# Altium PCB NEpic.PcbDoc (part 1 of 5)
Units mil, origin at the board's own origin, x right, y up, seen from the top; angles counter-clockwise.
Board outline 1660 x 1990 mil, 4 copper layers (Top Layer, GND, VCC, Bottom Layer); 30 components, 61 nets, 194 pads, 84 vias.
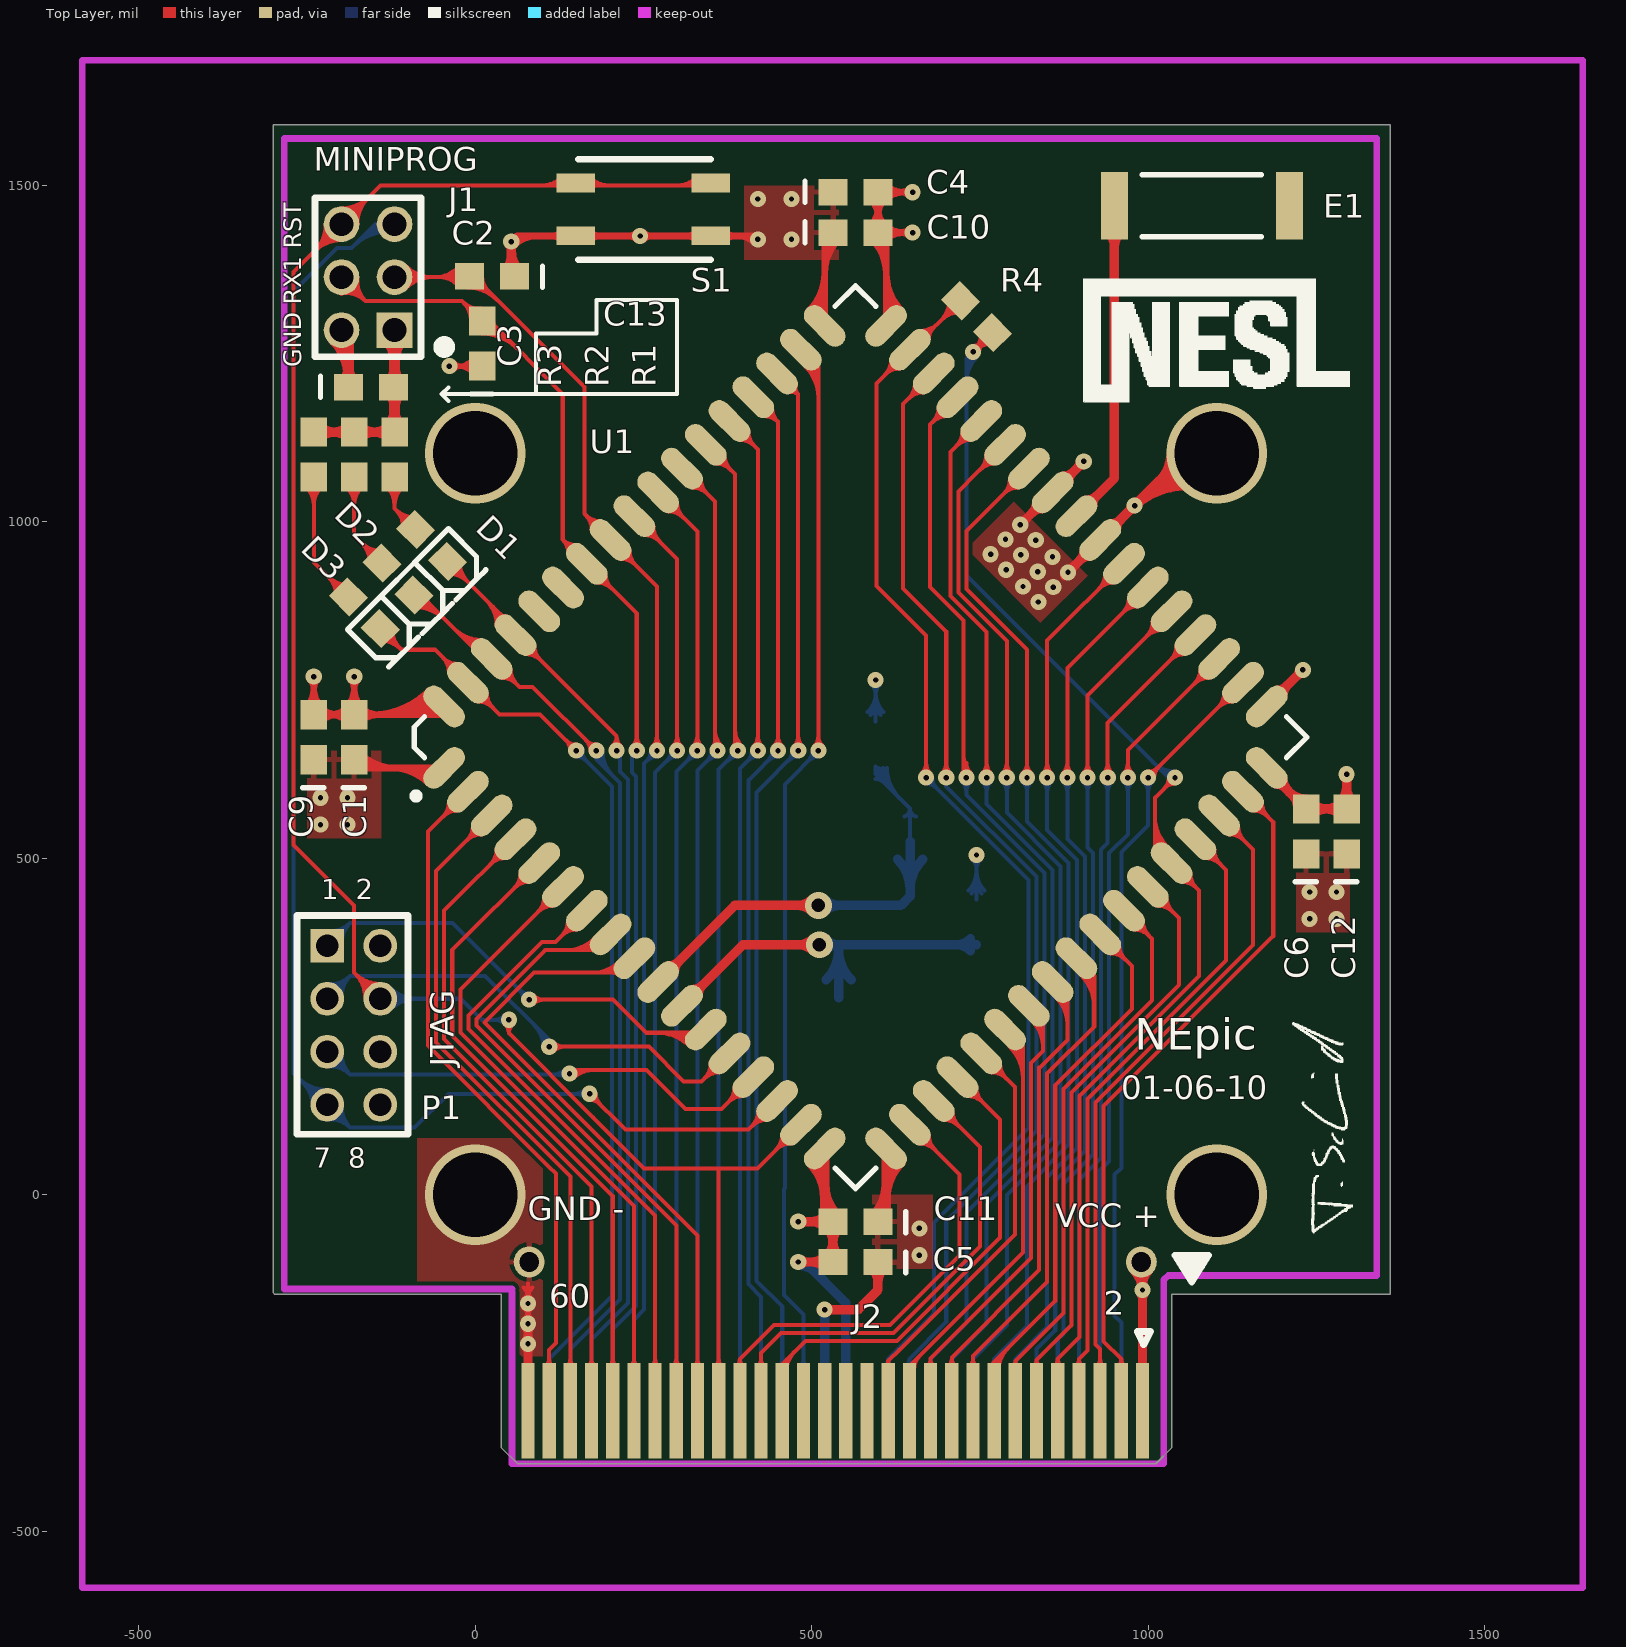
[diagram p0: Top Layer view]
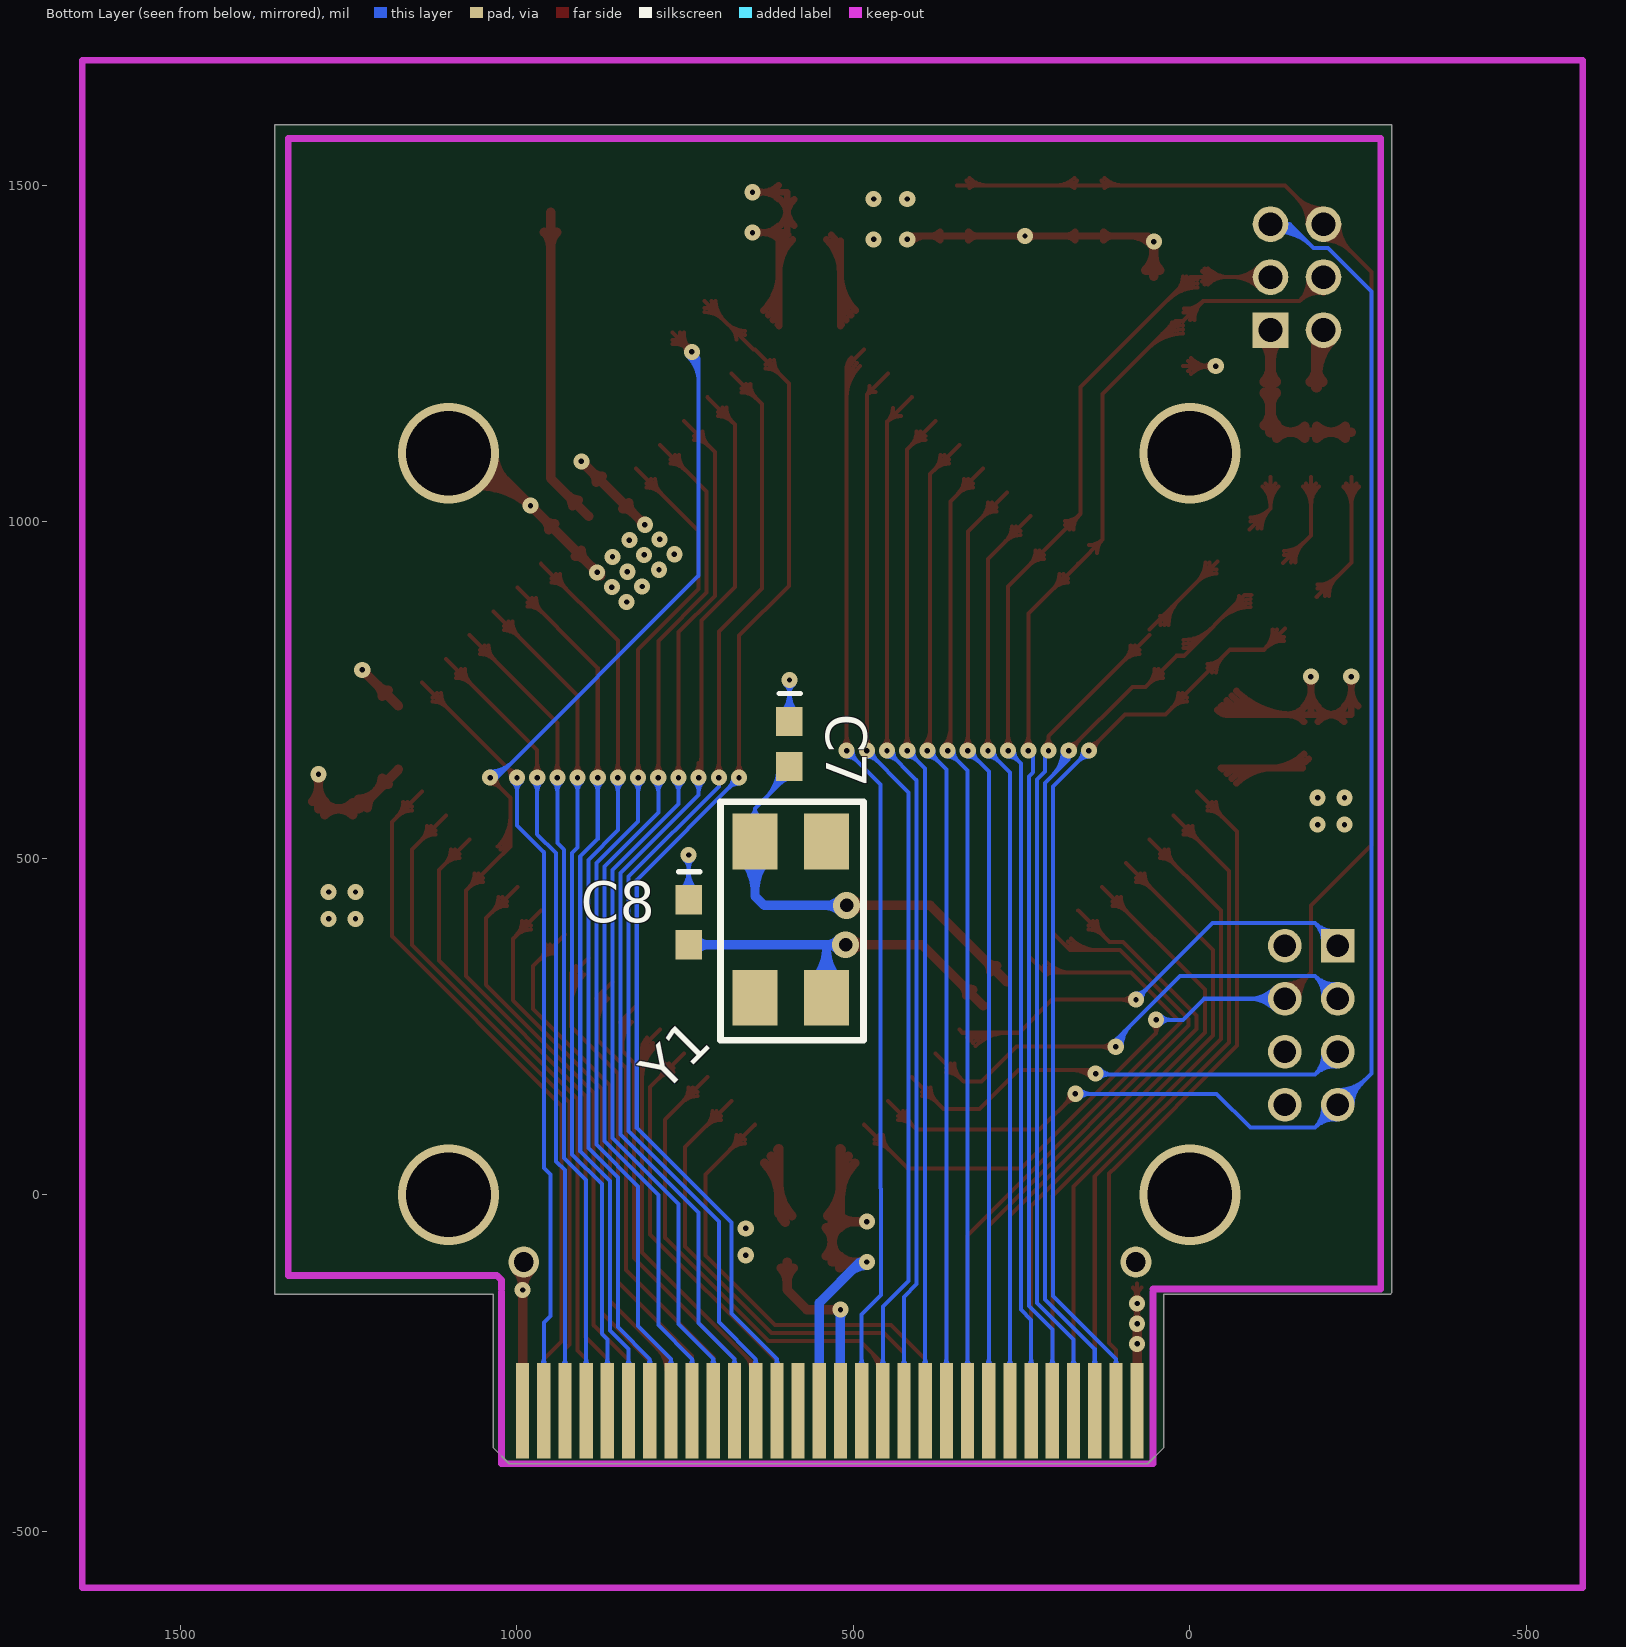
[diagram p1: Bottom Layer view, seen from below]
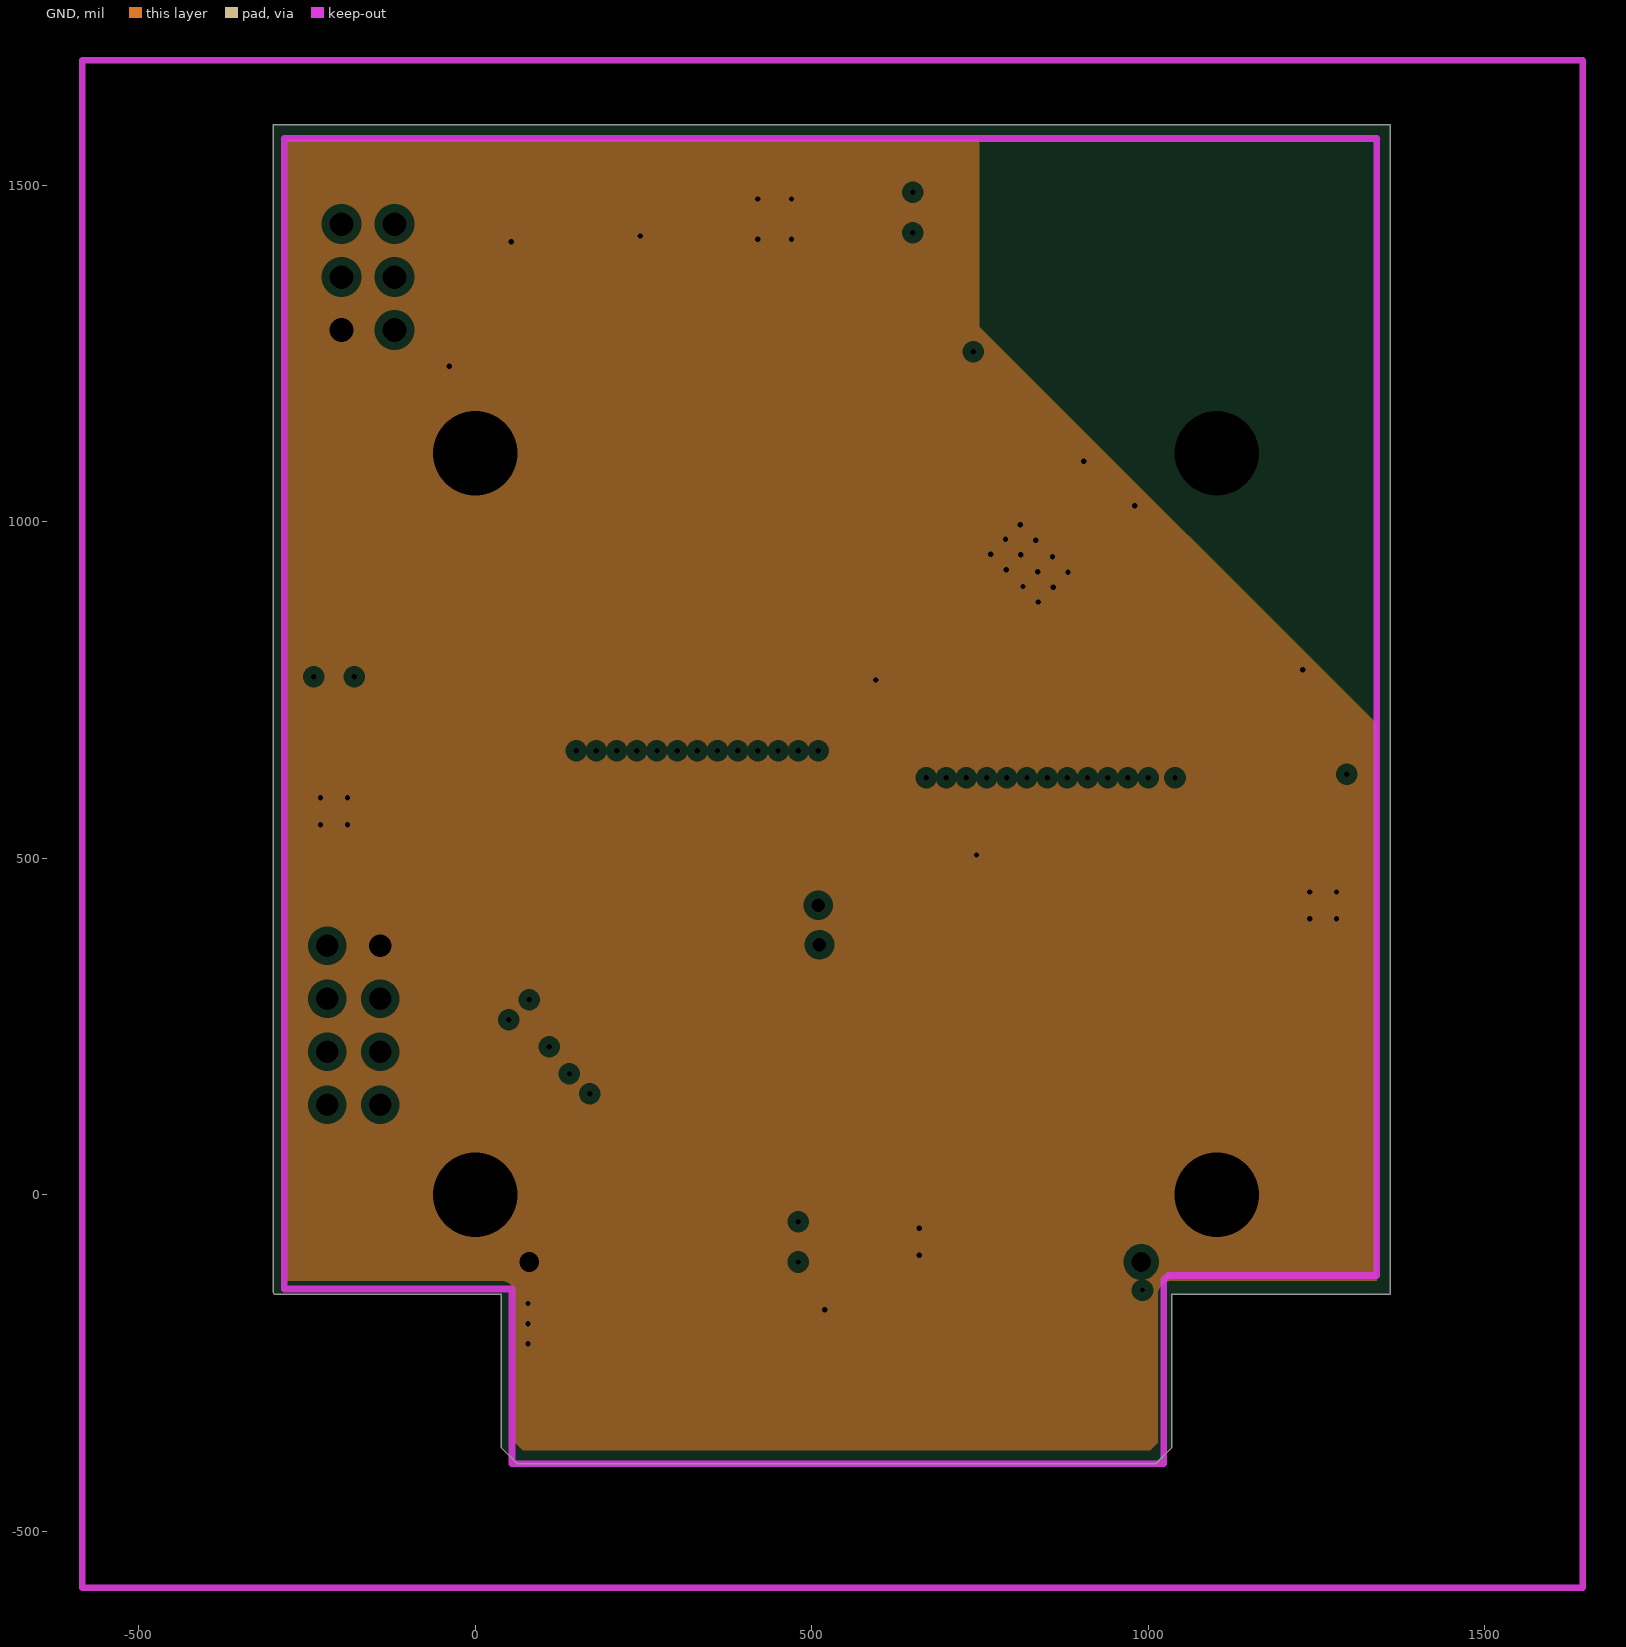
[diagram p2: GND, clearances drawn from the general rule]
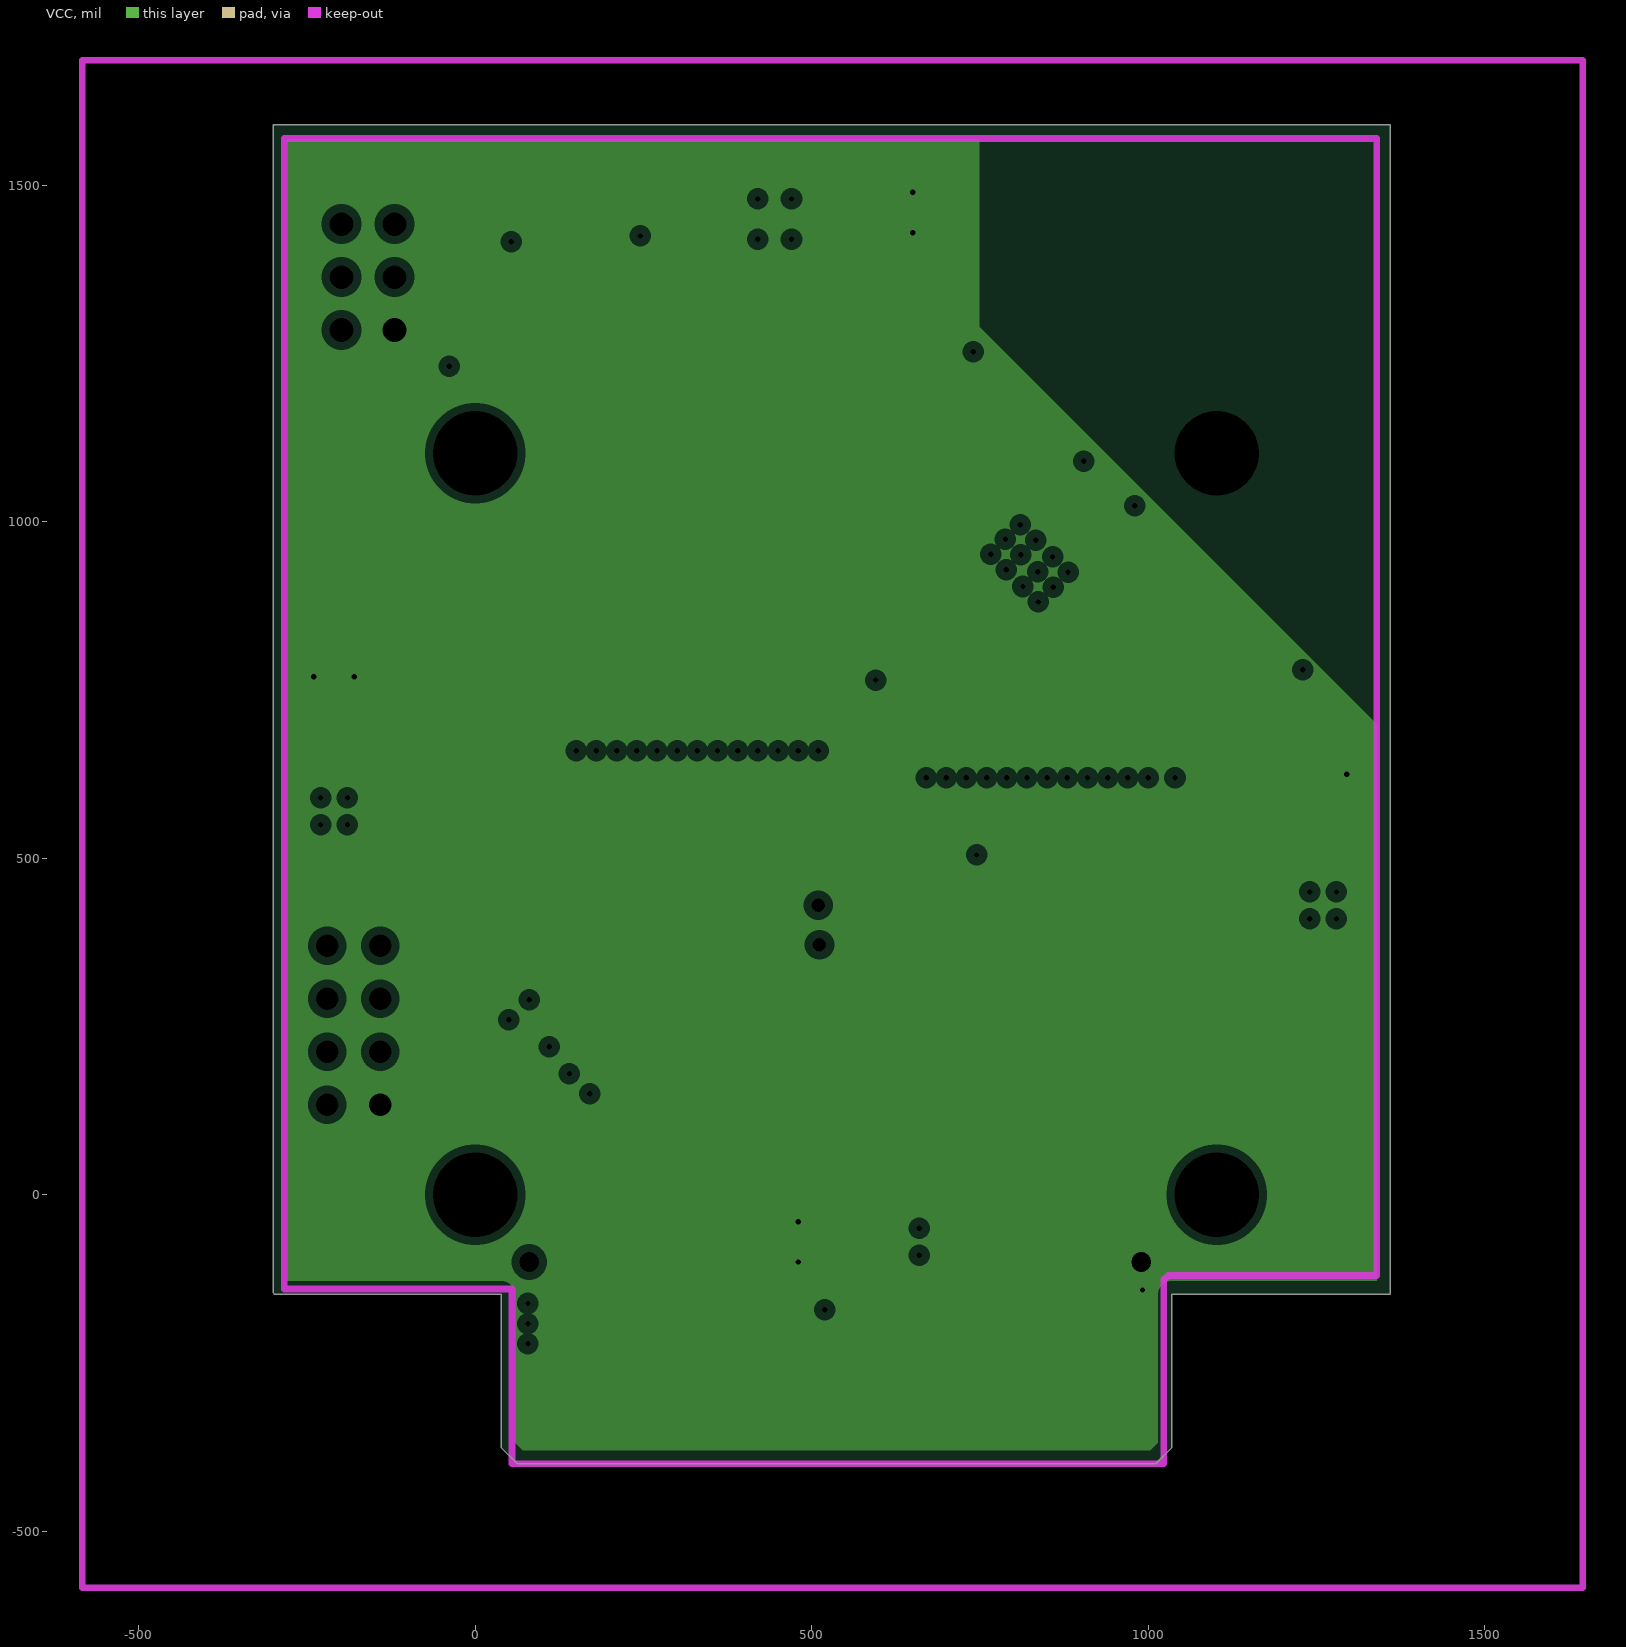
[diagram p3: VCC, clearances drawn from the general rule]

## Layer stack, top to bottom
Top Layer: signal copper 1.4
Dielectric: core 12.6, FR-4, Dk 4.8
GND: plane copper 1.4, net GND
Dielectric: prepreg 12.6, FR-4, Dk 4.8
VCC: plane copper 1.4, net VCC
Dielectric: core 12.6, FR-4, Dk 4.8
Bottom Layer: signal copper 1.4

## Board outline
-298.03,-148.03 -300,-146.06 -300,1590 1360,1590 1360,-148.03 1035,-148.03 1035,-376.38 1011.38,-400 62.56,-400 38.94,-376.38 38.94,-148.03

## Design rules (kind name [scope] priority, off if disabled: settings)
Clearance "Clearance~Sunstone Circuits" [All] p1: gap=6 // Sunstone Circuits Minimum Clearance Rule (MLB~4&6 Layer Designs)
HoleSize "HoleSize~Sunstone Circuits" [All] p1: absolutevalues=TRUE maxlimit=251 minlimit=8 maxpercent=80.000 minpercent=20.000 // Sunstone Circuits Hole Size Rule (MLB~4&6 Layer Designs)
HoleSize Testpoint [All] p2: absolutevalues=TRUE maxlimit=100 minlimit=1 maxpercent=80.000 minpercent=20.000
HoleSize TestPointUsage [All] p3: absolutevalues=TRUE maxlimit=100 minlimit=1 maxpercent=80.000 minpercent=20.000
MinimumAnnularRing "MinimumAnnularRing~Sunstone Circuits" [All] p1: minimumring=7 // Sunstone Circuits Minimum Annular Ring (MLB~4&6 Layer Designs)
PlaneClearance "PlaneClearance~Sunstone Circuits" [All] p1: clearance=12 // Sunstone Circuits Power Plane Clearance Rule (MLB~4&6 Layer Designs)
PlaneConnect [isVia] p1: planeconnectstyle=Direct reliefexpansion=20 reliefentries=4 reliefconductorwidth=10 reliefairgap=10
PlaneConnect "PlaneConnect~Sunstone Circuits" [All] p2: planeconnectstyle=Relief reliefexpansion=10 reliefentries=4 reliefconductorwidth=8 reliefairgap=10 // Sunstone Circuits Power Plane Connect Rule (MLB~4&6 Layer Designs)
PolygonConnect [isVia] p1: connectstyle=Direct reliefconductorwidth=10 reliefentries=4 polygonreliefangle="90 Angle"
PolygonConnect "PolygonConnect~Sunstone Circuits" [All] p2: connectstyle=Relief reliefconductorwidth=8 reliefentries=4 polygonreliefangle="90 Angle" // Sunstone Circuits Polygon Connect Style (MLB~4&6 Layer Designs)
RoutingVias "RoutingVias~Sunstone Circuits" [All] p1: holewidth=8 width=24 viastyle="Through Hole" minholewidth=8 minwidth=24 maxholewidth=20 maxwidth=40 // Sunstone Circuits Routing Vias Rule (MLB~4&6 Layer Designs)
ShortCircuit "ShortCircuit~Sunstone Circuits" [All] p1: allowed=FALSE // Sunstone Circuits Short Circuit Rule~Do Not Allow (MLB~4&6 Layer Designs)
SilkscreenOverComponentPads [All] p1: minsilkscreentomaskgap=10
SolderMaskExpansion "SolderMaskExpansion~Sunstone Circuits" [All] p1: expansion=3 // Sunstone Circuits Solder Mask Expansion Rule (MLB~4&6 Layer Designs)
ViasUnderSMD "ViasUnderSMD~Sunstone Circuits" [All] p1: allowed=FALSE // Sunstone Circuits Vias Under SMD~Do Not Allow (MLB~4&6 Layer Designs)
Width "Width~Sunstone Circuits" [All] p1: maxlimit=100 minlimit=6 preferedwidth=10 // Sunstone Circuits Minimum Width Rule (MLB~4&6 Layer Designs)
23 further rules are at their usual default settings.

## Components (designator, comment, footprint, x,y, rotation, side; value= is the part's Value field where it differs from the comment)
C1 "Cap" CC1608-0603 -180,680 r90 top
C2 "Cap" CC1608-0603 25,1365 r180 top
C3 "Cap" CC1608-0603 10,1265 r90 top
C4 "Cap" CC1608-0603 565,1490 r0 top
C5 "Cap" CC1608-0603 565,-100 r180 top
C6 "Cap" CC1608-0603 1235,540 r90 top
C7 "Cap" CC1608-0603 595,670 r270 bottom
C8 "Cap" CC1608-0603 745,405 r270 bottom
C9 "Cap" CC1608-0603 -240,680 r90 top
C10 "Cap" CC1608-0603 565,1430 r0 top
C11 "Cap" CC1608-0603 565,-40 r180 top
C12 "Cap" CC1608-0603 1295,540 r90 top
C13 "Cap" CC1608-0603 -155,1200 r0 top
D1 "LITEON/LED RED" LITEON/LED/0603 -65,965 r315 top
D2 "LITEON/LED GREEN" LITEON/LED/0603 -115,915 r315 top
D3 "LITEON/LED BLUE" LITEON/LED/0603 -165,865 r315 top
E1 "ANT/ATN-2.4" ANT/ANT-2.45-CHPCT-ND 1080,1470 r0 top
J1 "Epic MiniProg" "6-pin 2mm" -120,1285 r90 top
J2 "SAMTEC/MEC8-130" SAMTEC/MEC8L-130-CARD 1035,-400 r180 top locked
P1 "Epic JTAG" "Thomas/Header 2x4 2mm" -220,370 r270 top
R1 "Res3" CR1608-0603 -120,1100 r270 top
R2 "Res3" CR1608-0603 -180,1100 r270 top
R3 "Res3" CR1608-0603 -240,1100 r270 top
R4 "Res3" CR1608-0603 745,1305 r315 top
S1 "PANASONIC/EVQP2" PANASONIC/EVQP2 350,1425 r180 top
U1 "Epic Mote Compact" EPIC-Footprint 565,680 r45 top locked
Y1 "CRYSTAL_0" FOX/FQ7050B 540,525 r270 bottom
? "Comment" Signature_Thomas_Small 1305,-20 r90 top
? "Comment" Signature_Thomas_Small 1695,-1290 r90 top
? "Comment" NESL_Logo 900,1180 r0 top

## Footprints (in the part's own frame and the unit in brackets; to place one, negate y for a bottom-side part, rotate by r counter-clockwise, add the part's x,y. Pads: shape width x height; smd on the part's side, far side on the other; paste and mask are expansions set on the pad)
"6-pin 2mm" [mm] "6-pin 2mm spacing header"
  rect 1.346x1.346 hole 0.9 mask+0: 1(0,0)
  round 1.346 hole 0.9 mask+0: 2(0,2) 3(2,0) 4(2,2) 5(4,0) 6(4,2)
  silkscreen extent -1,-2.04 5,3
ANT/ANT-2.45-CHPCT-ND [mil] "ANT 2.4 GHZ SMD Chip Antenna"
  rect 40x100 smd mask+0: 1(-130,0) ""(130,0)
  silkscreen extent -89,-46 89,46, body extent -128,-43 128,43, height 39
CC1608-0603 [mm] "Chip Capacitor; Body 1.6 x 0.8 mm (LxW typ)"
  rect 1.1x1 smd mask+0: 1(-0.85,0) 2(0.85,0)
  silkscreen extent -1.91,-0.38 -1.91,0.42
CR1608-0603 [mm] "Chip Resistor; Body 1.6 x 0.8 mm (LxW typ)"
  rect 1.1x1 smd mask+0: 1(-0.85,0) 2(0.85,0)
EPIC-Footprint [mm] "LCC, 68-Pins, Body 24.1x24.1mm (max), Pitch 1.27mm, IPC Medium Density"
  oval 1.9x0.8 smd mask+0: 1(-11.8,10.16) 2(-11.8,8.89) 3(-11.8,7.62) 4(-11.8,6.35) 5(-11.8,5.08) 6(-11.8,3.81) 7(-11.8,2.54) 8(-11.8,1.27) 9(-11.8,0) 10(-11.8,-1.27) 11(-11.8,-2.54) 12(-11.8,-3.81) 13(-11.8,-5.08) 14(-11.8,-6.35) 15(-11.8,-7.62) 16(-11.8,-8.89) 17(-11.8,-10.16) 35(11.8,-10.16) 36(11.8,-8.89) 37(11.8,-7.62) 38(11.8,-6.35) 39(11.8,-5.08) 40(11.8,-3.81) 41(11.8,-2.54) 42(11.8,-1.27) 43(11.8,0) 44(11.8,1.27) 45(11.8,2.54) 46(11.8,3.81) 47(11.8,5.08) 48(11.8,6.35) 49(11.8,7.62) 50(11.8,8.89) 51(11.8,10.16)
  oval 0.8x1.9 smd mask+0: 18(-10.16,-11.8) 19(-8.89,-11.8) 20(-7.62,-11.8) 21(-6.35,-11.8) 22(-5.08,-11.8) 23(-3.81,-11.8) 24(-2.54,-11.8) 25(-1.27,-11.8) 26(0,-11.8) 27(1.27,-11.8) 28(2.54,-11.8) 29(3.81,-11.8) 30(5.08,-11.8) 31(6.35,-11.8) 32(7.62,-11.8) 33(8.89,-11.8) 34(10.16,-11.8) 52(10.16,11.8) 53(8.89,11.8) 54(7.62,11.8) 55(6.35,11.8) 56(5.08,11.8) 57(3.81,11.8) 58(2.54,11.8) 59(1.27,11.8) 60(0,11.8) 61(-1.27,11.8) 62(-2.54,11.8) 63(-3.81,11.8) 64(-5.08,11.8) 65(-6.35,11.8) 66(-7.62,11.8) 67(-8.89,11.8) 68(-10.16,11.8)
  silkscreen extent -13.42,-12.05 12.05,12.05, body extent -12.07,-12.07 12.07,12.07, height 2.54
FOX/FQ7050B [mm] "FOX FQ7050B Crystal Oscillaotr Footprint"
  rect 2.1x1.7 smd: 1(0,-2.7) 2(5.9,0) ""(0,0) ""(5.9,-2.7)
  silkscreen extent -1.5,-4 7.5,1.4
LITEON/LED/0603 [mm] "Chip LED; 0603; Body 1.6 x 0.8 mm (LxW typ)"
  rect 1.1x1 smd mask+0: 1(-0.85,0) 2(0.85,0)
  silkscreen extent 0,-0.9 2.1,0.9
NESL_Logo [mil]
  silkscreen extent 5,-1 400,181
PANASONIC/EVQP2 [mm] "Panasonic EVQP2 SMD Light Touch Switch 4.7mmx3.5mm"
  rect 1.45x0.7 smd mask+0: 1(5.1,0) 2(5.1,-2) 3(0,0) 4(0,-2)
  silkscreen extent 0,-2.9 5,0.9
SAMTEC/MEC8L-130-CARD [mm] "CARD Edge Connector for MEC8L-130, 30 positions, 60 pins"
  rect 0.5x3.6 smd far side: 1(1.1,-2) 3(1.9,-2) 5(2.7,-2) 7(3.5,-2) 9(4.3,-2) 11(5.1,-2) 13(5.9,-2) 15(6.7,-2) 17(7.5,-2) 19(8.3,-2) 21(9.1,-2) 23(9.9,-2) 25(10.7,-2) 27(11.5,-2) 29(12.3,-2) 31(13.1,-2) 33(13.9,-2) 35(14.7,-2) 37(15.5,-2) 39(16.3,-2) 41(17.1,-2) 43(17.9,-2) 45(18.7,-2) 47(19.5,-2) 49(20.3,-2) 51(21.1,-2) 53(21.9,-2) 55(22.7,-2) 57(23.5,-2) 59(24.3,-2)
  rect 0.5x3.6 smd: 2(1.1,-2) 4(1.9,-2) 6(2.7,-2) 8(3.5,-2) 10(4.3,-2) 12(5.1,-2) 14(5.9,-2) 16(6.7,-2) 18(7.5,-2) 20(8.3,-2) 22(9.1,-2) 24(9.9,-2) 26(10.7,-2) 28(11.5,-2) 30(12.3,-2) 32(13.1,-2) 34(13.9,-2) 36(14.7,-2) 38(15.5,-2) 40(16.3,-2) 42(17.1,-2) 44(17.9,-2) 46(18.7,-2) 48(19.5,-2) 50(20.3,-2) 52(21.1,-2) 54(21.9,-2) 56(22.7,-2) 58(23.5,-2) 60(24.3,-2)
  Keep-Out Layer lines w0.254: 24.9,-6.5 24.9,0 0.3,0 0.3,-6.5
  silkscreen extent 0.8,-5 1.3,-4.5
Signature_Thomas_Small [mil] "smaller signature"
  silkscreen extent -37,1 276,90
"Thomas/Header 2x4 2mm" [mm] "2x4 Header spaced 2mm"
  rect 1.27x1.27 hole 0.838 mask+0: 1(0,0)
  round 1.27 hole 0.838 mask+0: 2(0,2) 3(2,0) 4(2,2) 5(4,0) 6(4,2) 7(6,0) 8(6,2)
  silkscreen extent -1.14,-1.14 7.11,3.05

## Part data
C1 C2 C3 C4 C5 C6 C7 C8 C9 C10 C11 C12 C13: "Capacitor (Semiconductor SIM Model)"
D1: "LiteOn Red LED 0605 Footprint"
D2: "LiteOn Green LED 0605 Footprint"
D3: "LiteOn Blue LED 0605 Footprint"
E1: library part Antenna, "ANT/ANT-2.4 Chip Antenna"
J2: library part SAMTEC/HSEC8/50, "0.8mm Pitch 60 pin Card Edge Socket"
P1: library part "Header 4X2", "Header, 4-Pin, Dual row"
R1 R2 R3 R4: "Resistor"

## Free pads (board coordinates)
  round 46 hole 29: 0(80,-100) 0(990,-100)

## Via types
v1: diameter 24, hole 8, Top Layer to Bottom Layer, tented both sides, 78 vias
v2: diameter 150, hole 126, Top Layer to Bottom Layer, 4 vias
v3: diameter 40, hole 20, Top Layer to Bottom Layer, tented both sides, 2 vias

## Nets (pads, with @x,y where several pads share a name; then routed paths per layer and width w, separated by ;. In a path a pad name is that pad's centre, name@x,y a point inside that pad or via, vN(x,y) a via of type N, cw(c..) or ccw(c..) an arc to the next point about the centre after c; other vN are vias at no path point)
ADC0: J2.40 U1.19 | length 1089.3
  Top Layer w6: J2.40@393.27,-321.26 393.27,-244 ; U1.19@646.01,104.01 720,30.03 720,-90 616.61,-193.39 443.87,-193.39 393.27,-244 ; J2.40@388.49,-255.34 ccw(c377.43,-244) 393.27,-244 ; J2.40@388.49,-255.34 ccw(c377.43,-244) 393.27,-244 ; J2.40@388.49,-255.34 ccw(c377.43,-244) 393.27,-244 ; J2.40@388.49,-255.34 ccw(c377.43,-244) 393.27,-244 ; 393.27,-244 ccw(c409.11,-244) J2.40@398.05,-255.34 ; 393.27,-244 ccw(c409.11,-244) J2.40@398.05,-255.34 ; 393.27,-244 ccw(c409.11,-244) J2.40@398.05,-255.34 ; 393.27,-244 ccw(c409.11,-244) J2.40@398.05,-255.34 ; U1.19@661.32,75.95 cw(c661.32,45.18) 683.09,66.94 ; U1.19@661.32,75.95 cw(c661.32,45.18) 683.09,66.94 ; U1.19@661.32,75.95 cw(c661.32,45.18) 683.09,66.94 ; U1.19@661.32,75.95 cw(c661.32,45.18) 683.09,66.94 ; U1.19@661.32,81.95 cw(c661.32,65.66) 672.84,77.18 ; U1.19@661.32,81.95 cw(c661.32,65.66) 672.84,77.18 ; U1.19@661.32,81.95 cw(c661.32,65.66) 672.84,77.18 ; U1.19@661.32,81.95 cw(c661.32,65.66) 672.84,77.18 ; U1.19@668.07,88.7 ccw(c684.36,88.7) 672.84,77.18 ; U1.19@668.07,88.7 ccw(c684.36,88.7) 672.84,77.18 ; U1.19@668.07,88.7 ccw(c684.36,88.7) 672.84,77.18 ; U1.19@668.07,88.7 ccw(c684.36,88.7) 672.84,77.18 ; U1.19@674.07,88.7 ccw(c704.85,88.7) 683.09,66.94 ; U1.19@674.07,88.7 ccw(c704.85,88.7) 683.09,66.94 ; U1.19@674.07,88.7 ccw(c704.85,88.7) 683.09,66.94 ; U1.19@674.07,88.7 ccw(c704.85,88.7) 683.09,66.94
ADC1: J2.38 U1.20 | length 1121.1
  Top Layer w6: J2.38@424.76,-321.26 424.76,-235.24 454.61,-205.39 621.58,-205.39 750,-76.97 750,-60 750,70.74 U1.20@681.37,139.37 ; J2.38@419.93,-255.4 ccw(c408.24,-243.72) 424.76,-243.72 ; J2.38@419.93,-255.4 ccw(c408.24,-243.72) 424.76,-243.72 ; J2.38@419.93,-255.4 ccw(c408.24,-243.72) 424.76,-243.72 ; J2.38@419.93,-255.4 ccw(c408.24,-243.72) 424.76,-243.72 ; 424.76,-243.72 ccw(c441.28,-243.72) J2.38@429.6,-255.4 ; 424.76,-243.72 ccw(c441.28,-243.72) J2.38@429.6,-255.4 ; 424.76,-243.72 ccw(c441.28,-243.72) J2.38@429.6,-255.4 ; 424.76,-243.72 ccw(c441.28,-243.72) J2.38@429.6,-255.4 ; U1.20@696.68,111.31 cw(c696.68,80.53) 718.44,102.3 ; U1.20@696.68,111.31 cw(c696.68,80.53) 718.44,102.3 ; U1.20@696.68,111.31 cw(c696.68,80.53) 718.44,102.3 ; U1.20@696.68,111.31 cw(c696.68,80.53) 718.44,102.3 ; U1.20@696.68,117.31 cw(c696.68,101.02) 708.2,112.54 ; U1.20@696.68,117.31 cw(c696.68,101.02) 708.2,112.54 ; U1.20@696.68,117.31 cw(c696.68,101.02) 708.2,112.54 ; U1.20@696.68,117.31 cw(c696.68,101.02) 708.2,112.54 ; U1.20@703.43,124.06 ccw(c719.72,124.06) 708.2,112.54 ; U1.20@703.43,124.06 ccw(c719.72,124.06) 708.2,112.54 ; U1.20@703.43,124.06 ccw(c719.72,124.06) 708.2,112.54 ; U1.20@703.43,124.06 ccw(c719.72,124.06) 708.2,112.54 ; U1.20@709.43,124.06 ccw(c740.2,124.06) 718.44,102.3 ; U1.20@709.43,124.06 ccw(c740.2,124.06) 718.44,102.3 ; U1.20@709.43,124.06 ccw(c740.2,124.06) 718.44,102.3 ; U1.20@709.43,124.06 ccw(c740.2,124.06) 718.44,102.3
ADC2: J2.36 U1.21 | length 1219.9
  Top Layer w6: J2.36@456.26,-321.26 456.26,-251.67 490.54,-217.39 626.55,-217.39 780,-63.94 780,111.45 U1.21@716.72,174.72 ; J2.36@457.1,-260.24 cw(c479.82,-260.24) 463.76,-244.17 ; J2.36@457.1,-260.24 cw(c479.82,-260.24) 463.76,-244.17 ; J2.36@457.1,-260.24 cw(c479.82,-260.24) 463.76,-244.17 ; J2.36@457.1,-260.24 cw(c479.82,-260.24) 463.76,-244.17 ; J2.36@463.1,-260.24 cw(c500.3,-260.24) 474,-233.93 ; J2.36@463.1,-260.24 cw(c500.3,-260.24) 474,-233.93 ; J2.36@463.1,-260.24 cw(c500.3,-260.24) 474,-233.93 ; J2.36@463.1,-260.24 cw(c500.3,-260.24) 474,-233.93 ; U1.21@732.03,146.66 cw(c732.03,115.89) 753.8,137.65 ; U1.21@732.03,146.66 cw(c732.03,115.89) 753.8,137.65 ; U1.21@732.03,146.66 cw(c732.03,115.89) 753.8,137.65 ; U1.21@732.03,146.66 cw(c732.03,115.89) 753.8,137.65 ; U1.21@732.03,152.66 cw(c732.03,136.37) 743.55,147.89 ; U1.21@732.03,152.66 cw(c732.03,136.37) 743.55,147.89 ; U1.21@732.03,152.66 cw(c732.03,136.37) 743.55,147.89 ; U1.21@732.03,152.66 cw(c732.03,136.37) 743.55,147.89 ; U1.21@738.78,159.41 ccw(c755.07,159.41) 743.55,147.89 ; U1.21@738.78,159.41 ccw(c755.07,159.41) 743.55,147.89 ; U1.21@738.78,159.41 ccw(c755.07,159.41) 743.55,147.89 ; U1.21@738.78,159.41 ccw(c755.07,159.41) 743.55,147.89 ; U1.21@744.78,159.41 ccw(c775.56,159.41) 753.8,137.65 ; U1.21@744.78,159.41 ccw(c775.56,159.41) 753.8,137.65 ; U1.21@744.78,159.41 ccw(c775.56,159.41) 753.8,137.65 ; U1.21@744.78,159.41 ccw(c775.56,159.41) 753.8,137.65
ADC3: J2.26 U1.22 | length 995.6
  Top Layer w6: J2.26@613.74,-321.26 613.74,-247.17 ; U1.22@752.08,210.08 802,160.16 802,-58.91 630.91,-230 613.74,-247.17 ; J2.26@609.84,-254.61 ccw(c604.69,-247.17) 613.74,-247.17 ; J2.26@609.84,-254.61 ccw(c604.69,-247.17) 613.74,-247.17 ; J2.26@609.84,-254.61 ccw(c604.69,-247.17) 613.74,-247.17 ; J2.26@609.84,-254.61 ccw(c604.69,-247.17) 613.74,-247.17 ; 613.74,-247.17 ccw(c622.79,-247.17) J2.26@617.64,-254.61 ; 613.74,-247.17 ccw(c622.79,-247.17) J2.26@617.64,-254.61 ; 613.74,-247.17 ccw(c622.79,-247.17) J2.26@617.64,-254.61 ; 613.74,-247.17 ccw(c622.79,-247.17) J2.26@617.64,-254.61 ; U1.22@767.39,182.02 cw(c767.39,151.24) 789.15,173.01 ; U1.22@767.39,182.02 cw(c767.39,151.24) 789.15,173.01 ; U1.22@767.39,182.02 cw(c767.39,151.24) 789.15,173.01 ; U1.22@767.39,182.02 cw(c767.39,151.24) 789.15,173.01 ; U1.22@767.39,188.02 cw(c767.39,171.73) 778.91,183.25 ; U1.22@767.39,188.02 cw(c767.39,171.73) 778.91,183.25 ; U1.22@767.39,188.02 cw(c767.39,171.73) 778.91,183.25 ; U1.22@767.39,188.02 cw(c767.39,171.73) 778.91,183.25 ; U1.22@774.14,194.77 ccw(c790.43,194.77) 778.91,183.25 ; U1.22@774.14,194.77 ccw(c790.43,194.77) 778.91,183.25 ; U1.22@774.14,194.77 ccw(c790.43,194.77) 778.91,183.25 ; U1.22@774.14,194.77 ccw(c790.43,194.77) 778.91,183.25 ; U1.22@780.14,194.77 ccw(c810.91,194.77) 789.15,173.01 ; U1.22@780.14,194.77 ccw(c810.91,194.77) 789.15,173.01 ; U1.22@780.14,194.77 ccw(c810.91,194.77) 789.15,173.01 ; U1.22@780.14,194.77 ccw(c810.91,194.77) 789.15,173.01
ADC4: J2.24 U1.23 | length 1424.1
  Top Layer w6: J2.24@645.24,-321.26 645.24,-254.76 814,-86 814,218.87 ; U1.23@787.43,245.44 814,218.87 ; J2.24@646.08,-260.24 cw(c661.32,-260.24) 650.54,-249.46 ; J2.24@646.08,-260.24 cw(c661.32,-260.24) 650.54,-249.46 ; J2.24@646.08,-260.24 cw(c661.32,-260.24) 650.54,-249.46 ; J2.24@646.08,-260.24 cw(c661.32,-260.24) 650.54,-249.46 ; J2.24@652.08,-260.24 cw(c681.81,-260.24) 660.79,-239.21 ; J2.24@652.08,-260.24 cw(c681.81,-260.24) 660.79,-239.21 ; J2.24@652.08,-260.24 cw(c681.81,-260.24) 660.79,-239.21 ; J2.24@652.08,-260.24 cw(c681.81,-260.24) 660.79,-239.21 ; U1.23@793.73,221.11 cw(c744.79,172.17) 814,172.17 ; U1.23@793.73,221.11 cw(c744.79,172.17) 814,172.17 ; U1.23@793.73,221.11 cw(c744.79,172.17) 814,172.17 ; U1.23@793.73,221.11 cw(c744.79,172.17) 814,172.17 ; U1.23@797.97,225.35 cw(c759.28,186.66) 814,186.66 ; U1.23@797.97,225.35 cw(c759.28,186.66) 814,186.66 ; U1.23@797.97,225.35 cw(c759.28,186.66) 814,186.66 ; U1.23@797.97,225.35 cw(c759.28,186.66) 814,186.66 ; U1.23@802.21,229.6 cw(c773.76,201.14) 814,201.14 ; U1.23@802.21,229.6 cw(c773.76,201.14) 814,201.14 ; U1.23@802.21,229.6 cw(c773.76,201.14) 814,201.14 ; U1.23@802.21,229.6 cw(c773.76,201.14) 814,201.14 ; U1.23@806.46,233.84 cw(c788.25,215.63) 814,215.63 ; U1.23@806.46,233.84 cw(c788.25,215.63) 814,215.63 ; U1.23@806.46,233.84 cw(c788.25,215.63) 814,215.63 ; U1.23@806.46,233.84 cw(c788.25,215.63) 814,215.63 ; U1.23@809.57,219.36 cw(c811.48,216.35) 814,218.87 ; U1.23@809.57,219.36 cw(c811.48,216.35) 814,218.87 ; U1.23@809.57,219.36 cw(c811.48,216.35) 814,218.87 ; U1.23@809.57,219.36 cw(c811.48,216.35) 814,218.87 ; U1.23@813.51,223.3 ccw(c816.52,221.39) 814,218.87 ; U1.23@813.51,223.3 ccw(c816.52,221.39) 814,218.87 ; U1.23@813.51,223.3 ccw(c816.52,221.39) 814,218.87 ; U1.23@813.51,223.3 ccw(c816.52,221.39) 814,218.87
ADC5: J2.22 U1.24 | length 1149.3
  Top Layer w6: J2.22@676.73,-321.26 676.73,-243.27 826,-94 826,196 843.49,213.49 843.49,260.09 U1.24@822.79,280.79 ; J2.22@671.89,-255.4 ccw(c660.21,-243.72) 676.73,-243.72 ; J2.22@671.89,-255.4 ccw(c660.21,-243.72) 676.73,-243.72 ; J2.22@671.89,-255.4 ccw(c660.21,-243.72) 676.73,-243.72 ; J2.22@671.89,-255.4 ccw(c660.21,-243.72) 676.73,-243.72 ; 676.73,-243.72 ccw(c693.25,-243.72) J2.22@681.57,-255.4 ; 676.73,-243.72 ccw(c693.25,-243.72) J2.22@681.57,-255.4 ; 676.73,-243.72 ccw(c693.25,-243.72) J2.22@681.57,-255.4 ; 676.73,-243.72 ccw(c693.25,-243.72) J2.22@681.57,-255.4 ; U1.24@829.09,256.46 cw(c794.32,221.7) 843.49,221.7 ; U1.24@829.09,256.46 cw(c794.32,221.7) 843.49,221.7 ; U1.24@829.09,256.46 cw(c794.32,221.7) 843.49,221.7 ; U1.24@829.09,256.46 cw(c794.32,221.7) 843.49,221.7 ; U1.24@833.33,260.71 cw(c808.8,236.18) 843.49,236.18 ; U1.24@833.33,260.71 cw(c808.8,236.18) 843.49,236.18 ; U1.24@833.33,260.71 cw(c808.8,236.18) 843.49,236.18 ; U1.24@833.33,260.71 cw(c808.8,236.18) 843.49,236.18 ; U1.24@837.57,264.95 cw(c823.29,250.67) 843.49,250.67 ; U1.24@837.57,264.95 cw(c823.29,250.67) 843.49,250.67 ; U1.24@837.57,264.95 cw(c823.29,250.67) 843.49,250.67 ; U1.24@837.57,264.95 cw(c823.29,250.67) 843.49,250.67 ; 843.49,247.71 cw(c855.87,247.71) U1.24@847.11,256.46 ; 843.49,247.71 cw(c855.87,247.71) U1.24@847.11,256.46 ; 843.49,247.71 cw(c855.87,247.71) U1.24@847.11,256.46 ; 843.49,247.71 cw(c855.87,247.71) U1.24@847.11,256.46
ADC6/DAC0: J2.20 U1.25 | length 1212.6
  Top Layer w6: J2.20@708.23,-321.26 708.23,-241.77 838,-112 838,189 839,189 880,230 880,240 880,294.29 U1.25@858.14,316.15 ; J2.20@703.39,-255.4 ccw(c691.71,-243.72) 708.23,-243.72 ; J2.20@703.39,-255.4 ccw(c691.71,-243.72) 708.23,-243.72 ; J2.20@703.39,-255.4 ccw(c691.71,-243.72) 708.23,-243.72 ; J2.20@703.39,-255.4 ccw(c691.71,-243.72) 708.23,-243.72 ; 708.23,-243.72 ccw(c724.75,-243.72) J2.20@713.07,-255.4 ; 708.23,-243.72 ccw(c724.75,-243.72) J2.20@713.07,-255.4 ; 708.23,-243.72 ccw(c724.75,-243.72) J2.20@713.07,-255.4 ; 708.23,-243.72 ccw(c724.75,-243.72) J2.20@713.07,-255.4 ; U1.25@864.44,291.82 cw(c826.88,254.26) 880,254.26 ; U1.25@864.44,291.82 cw(c826.88,254.26) 880,254.26 ; U1.25@864.44,291.82 cw(c826.88,254.26) 880,254.26 ; U1.25@864.44,291.82 cw(c826.88,254.26) 880,254.26 ; U1.25@868.68,296.06 cw(c841.36,268.74) 880,268.74 ; U1.25@868.68,296.06 cw(c841.36,268.74) 880,268.74 ; U1.25@868.68,296.06 cw(c841.36,268.74) 880,268.74 ; U1.25@868.68,296.06 cw(c841.36,268.74) 880,268.74 ; U1.25@872.93,300.31 cw(c855.85,283.23) 880,283.23 ; U1.25@872.93,300.31 cw(c855.85,283.23) 880,283.23 ; U1.25@872.93,300.31 cw(c855.85,283.23) 880,283.23 ; U1.25@872.93,300.31 cw(c855.85,283.23) 880,283.23 ; 880,285.86 cw(c888.43,285.86) U1.25@882.47,291.82 ; 880,285.86 cw(c888.43,285.86) U1.25@882.47,291.82 ; 880,285.86 cw(c888.43,285.86) U1.25@882.47,291.82 ; 880,285.86 cw(c888.43,285.86) U1.25@882.47,291.82
ADC7/DAC1: J2.18 U1.26 | length 1493.5
  Top Layer w6: J2.18@739.72,-321.26 739.72,-240 749.72,-230 850,-129.72 850,180 920,250 920,325 ; U1.26@893.5,351.5 920,325 ; J2.18@734.89,-255.4 ccw(c723.2,-243.72) 739.72,-243.72 ; J2.18@734.89,-255.4 ccw(c723.2,-243.72) 739.72,-243.72 ; J2.18@734.89,-255.4 ccw(c723.2,-243.72) 739.72,-243.72 ; J2.18@734.89,-255.4 ccw(c723.2,-243.72) 739.72,-243.72 ; 739.72,-243.72 ccw(c756.24,-243.72) J2.18@744.56,-255.4 ; 739.72,-243.72 ccw(c756.24,-243.72) J2.18@744.56,-255.4 ; 739.72,-243.72 ccw(c756.24,-243.72) J2.18@744.56,-255.4 ; 739.72,-243.72 ccw(c756.24,-243.72) J2.18@744.56,-255.4 ; U1.26@899.8,327.18 cw(c851.02,278.4) 920,278.4 ; U1.26@899.8,327.18 cw(c851.02,278.4) 920,278.4 ; U1.26@899.8,327.18 cw(c851.02,278.4) 920,278.4 ; U1.26@899.8,327.18 cw(c851.02,278.4) 920,278.4 ; U1.26@904.04,331.42 cw(c865.5,292.88) 920,292.88 ; U1.26@904.04,331.42 cw(c865.5,292.88) 920,292.88 ; U1.26@904.04,331.42 cw(c865.5,292.88) 920,292.88 ; U1.26@904.04,331.42 cw(c865.5,292.88) 920,292.88 ; U1.26@908.28,335.66 cw(c879.99,307.37) 920,307.37 ; U1.26@908.28,335.66 cw(c879.99,307.37) 920,307.37 ; U1.26@908.28,335.66 cw(c879.99,307.37) 920,307.37 ; U1.26@908.28,335.66 cw(c879.99,307.37) 920,307.37 ; U1.26@912.52,339.9 cw(c894.47,321.85) 920,321.85 ; U1.26@912.52,339.9 cw(c894.47,321.85) 920,321.85 ; U1.26@912.52,339.9 cw(c894.47,321.85) 920,321.85 ; U1.26@912.52,339.9 cw(c894.47,321.85) 920,321.85 ; U1.26@915.7,325.46 cw(c917.56,322.56) 920,325 ; U1.26@915.7,325.46 cw(c917.56,322.56) 920,325 ; U1.26@915.7,325.46 cw(c917.56,322.56) 920,325 ; U1.26@915.7,325.46 cw(c917.56,322.56) 920,325 ; U1.26@919.54,329.3 ccw(c922.44,327.44) 920,325 ; U1.26@919.54,329.3 ccw(c922.44,327.44) 920,325 ; U1.26@919.54,329.3 ccw(c922.44,327.44) 920,325 ; U1.26@919.54,329.3 ccw(c922.44,327.44) 920,325
ATEST1: J2.17 U1.46 | length 2251.4
  Top Layer w6: U1.46@787.43,1114.56 746,1073.13 718,1045.13 718,991.39 718,895.03 790,823.03 v1(790,620) ; 750.36,1077.49 cw(c772.12,1055.73) U1.46@772.12,1086.5 ; 750.36,1077.49 ccw(c728.6,1099.25) U1.46@759.37,1099.25 ; 750.36,1077.49 cw(c772.12,1055.73) U1.46@772.12,1086.5 ; 750.36,1077.49 ccw(c728.6,1099.25) U1.46@759.37,1099.25 ; 750.36,1077.49 cw(c772.12,1055.73) U1.46@772.12,1086.5 ; 750.36,1077.49 ccw(c728.6,1099.25) U1.46@759.37,1099.25 ; 750.36,1077.49 ccw(c728.6,1099.25) U1.46@759.37,1099.25 ; 750.36,1077.49 cw(c772.12,1055.73) U1.46@772.12,1086.5 ; 760.6,1087.73 cw(c772.12,1076.21) U1.46@772.12,1092.5 ; 760.6,1087.73 ccw(c749.08,1099.25) U1.46@765.37,1099.25 ; 760.6,1087.73 cw(c772.12,1076.21) U1.46@772.12,1092.5 ; 760.6,1087.73 ccw(c749.08,1099.25) U1.46@765.37,1099.25 ; 760.6,1087.73 cw(c772.12,1076.21) U1.46@772.12,1092.5 ; 760.6,1087.73 ccw(c749.08,1099.25) U1.46@765.37,1099.25 ; 760.6,1087.73 ccw(c749.08,1099.25) U1.46@765.37,1099.25 ; 760.6,1087.73 cw(c772.12,1076.21) U1.46@772.12,1092.5 ; v1@783.64,626.36 ccw(c768.27,641.73) 790,641.73 ; v1@783.64,626.36 ccw(c768.27,641.73) 790,641.73 ; v1@783.64,626.36 ccw(c768.27,641.73) 790,641.73 ; v1@783.64,626.36 ccw(c768.27,641.73) 790,641.73 ; 790,641.73 ccw(c811.73,641.73) v1@796.36,626.36 ; 790,641.73 ccw(c811.73,641.73) v1@796.36,626.36 ; 790,641.73 ccw(c811.73,641.73) v1@796.36,626.36 ; 790,641.73 ccw(c811.73,641.73) v1@796.36,626.36
  Bottom Layer w6: J2.17@739.72,-321.26 739.72,-244 ; v1(790,620) 790,567.88 870,487.88 870,79.52 790,-0.48 790,-193.72 739.72,-244 ; J2.17@734.95,-255.34 ccw(c723.88,-244) 739.72,-244 ; J2.17@734.95,-255.34 ccw(c723.88,-244) 739.72,-244 ; J2.17@734.95,-255.34 ccw(c723.88,-244) 739.72,-244 ; J2.17@734.95,-255.34 ccw(c723.88,-244) 739.72,-244 ; 739.72,-244 ccw(c755.56,-244) J2.17@744.5,-255.34 ; 739.72,-244 ccw(c755.56,-244) J2.17@744.5,-255.34 ; 739.72,-244 ccw(c755.56,-244) J2.17@744.5,-255.34 ; 739.72,-244 ccw(c755.56,-244) J2.17@744.5,-255.34 ; v1@783.64,613.64 cw(c768.27,598.27) 790,598.27 ; v1@783.64,613.64 cw(c768.27,598.27) 790,598.27 ; v1@783.64,613.64 cw(c768.27,598.27) 790,598.27 ; v1@783.64,613.64 cw(c768.27,598.27) 790,598.27 ; 790,598.27 cw(c811.73,598.27) v1@796.36,613.64 ; 790,598.27 cw(c811.73,598.27) v1@796.36,613.64 ; 790,598.27 cw(c811.73,598.27) v1@796.36,613.64 ; 790,598.27 cw(c811.73,598.27) v1@796.36,613.64
ATEST2: J2.19 U1.47 | length 2285.1
  Top Layer w6: U1.47@752.08,1149.92 706,1103.84 706,1008.21 706,890.06 760,836.06 v1(760,620) ; 715,1112.85 cw(c736.77,1091.08) U1.47@736.77,1121.86 ; 715,1112.85 ccw(c693.24,1134.61) U1.47@724.02,1134.61 ; 715,1112.85 cw(c736.77,1091.08) U1.47@736.77,1121.86 ; 715,1112.85 ccw(c693.24,1134.61) U1.47@724.02,1134.61 ; 715,1112.85 cw(c736.77,1091.08) U1.47@736.77,1121.86 ; 715,1112.85 ccw(c693.24,1134.61) U1.47@724.02,1134.61 ; 715,1112.85 ccw(c693.24,1134.61) U1.47@724.02,1134.61 ; 715,1112.85 cw(c736.77,1091.08) U1.47@736.77,1121.86 ; 725.25,1123.09 cw(c736.77,1111.57) U1.47@736.77,1127.86 ; 725.25,1123.09 ccw(c713.73,1134.61) U1.47@730.02,1134.61 ; 725.25,1123.09 cw(c736.77,1111.57) U1.47@736.77,1127.86 ; 725.25,1123.09 ccw(c713.73,1134.61) U1.47@730.02,1134.61 ; 725.25,1123.09 cw(c736.77,1111.57) U1.47@736.77,1127.86 ; 725.25,1123.09 ccw(c713.73,1134.61) U1.47@730.02,1134.61 ; 725.25,1123.09 ccw(c713.73,1134.61) U1.47@730.02,1134.61 ; 725.25,1123.09 cw(c736.77,1111.57) U1.47@736.77,1127.86 ; v1@753.64,626.36 ccw(c738.27,641.73) 760,641.73 ; v1@753.64,626.36 ccw(c738.27,641.73) 760,641.73 ; v1@753.64,626.36 ccw(c738.27,641.73) 760,641.73 ; v1@753.64,626.36 ccw(c738.27,641.73) 760,641.73 ; 760,641.73 ccw(c781.73,641.73) v1@766.36,626.36 ; 760,641.73 ccw(c781.73,641.73) v1@766.36,626.36 ; 760,641.73 ccw(c781.73,641.73) v1@766.36,626.36 ; 760,641.73 ccw(c781.73,641.73) v1@766.36,626.36
  Bottom Layer w6: J2.19@708.23,-321.26 708.23,-244 ; v1(760,620) 760,580.91 858,482.91 858,84.49 760,-13.51 760,-192.23 708.23,-244 ; J2.19@703.45,-255.34 ccw(c692.39,-244) 708.23,-244 ; J2.19@703.45,-255.34 ccw(c692.39,-244) 708.23,-244 ; J2.19@703.45,-255.34 ccw(c692.39,-244) 708.23,-244 ; J2.19@703.45,-255.34 ccw(c692.39,-244) 708.23,-244 ; 708.23,-244 ccw(c724.07,-244) J2.19@713.01,-255.34 ; 708.23,-244 ccw(c724.07,-244) J2.19@713.01,-255.34 ; 708.23,-244 ccw(c724.07,-244) J2.19@713.01,-255.34 ; 708.23,-244 ccw(c724.07,-244) J2.19@713.01,-255.34 ; v1@753.64,613.64 cw(c738.27,598.27) 760,598.27 ; v1@753.64,613.64 cw(c738.27,598.27) 760,598.27 ; v1@753.64,613.64 cw(c738.27,598.27) 760,598.27 ; v1@753.64,613.64 cw(c738.27,598.27) 760,598.27 ; 760,598.27 cw(c781.73,598.27) v1@766.36,613.64 ; 760,598.27 cw(c781.73,598.27) v1@766.36,613.64 ; 760,598.27 cw(c781.73,598.27) v1@766.36,613.64 ; 760,598.27 cw(c781.73,598.27) v1@766.36,613.64
FLASH_CS: J2.3 U1.36 | length 1838.2
  Top Layer w6: v1(1000,620) U1.36@1140.99,761.01 ; v1@1000,629 ccw(c1000,650.67) 1015.32,635.35 ; v1@1000,629 ccw(c1000,650.67) 1015.32,635.35 ; v1@1000,629 ccw(c1000,650.67) 1015.32,635.35 ; v1@1000,629 ccw(c1000,650.67) 1015.32,635.35 ; v1@1009,620 cw(c1030.79,620) 1015.38,635.41 ; v1@1009,620 cw(c1030.79,620) 1015.38,635.41 ; v1@1009,620 cw(c1030.79,620) 1015.38,635.41 ; v1@1009,620 cw(c1030.79,620) 1015.38,635.41 ; 1103.91,723.94 cw(c1125.67,702.18) U1.36@1125.67,732.95 ; 1103.91,723.94 ccw(c1082.15,745.7) U1.36@1112.93,745.7 ; 1103.91,723.94 cw(c1125.67,702.18) U1.36@1125.67,732.95 ; 1103.91,723.94 ccw(c1082.15,745.7) U1.36@1112.93,745.7 ; 1103.91,723.94 cw(c1125.67,702.18) U1.36@1125.67,732.95 ; 1103.91,723.94 ccw(c1082.15,745.7) U1.36@1112.93,745.7 ; 1103.91,723.94 ccw(c1082.15,745.7) U1.36@1112.93,745.7 ; 1103.91,723.94 cw(c1125.67,702.18) U1.36@1125.67,732.95 ; 1114.16,734.18 cw(c1125.67,722.66) U1.36@1125.67,738.95 ; 1114.16,734.18 ccw(c1102.64,745.7) U1.36@1118.93,745.7 ; 1114.16,734.18 cw(c1125.67,722.66) U1.36@1125.67,738.95 ; 1114.16,734.18 ccw(c1102.64,745.7) U1.36@1118.93,745.7 ; 1114.16,734.18 cw(c1125.67,722.66) U1.36@1125.67,738.95 ; 1114.16,734.18 ccw(c1102.64,745.7) U1.36@1118.93,745.7 ; 1114.16,734.18 ccw(c1102.64,745.7) U1.36@1118.93,745.7 ; 1114.16,734.18 cw(c1125.67,722.66) U1.36@1125.67,738.95
  Bottom Layer w6: J2.3@960.2,-321.26 960.2,-190.2 950,-180 950,29.8 960.2,40 960.2,508.99 964,512.79 1000,548.79 v1(1000,620) ; J2.3@955.36,-255.4 ccw(c943.68,-243.72) 960.2,-243.72 ; J2.3@955.36,-255.4 ccw(c943.68,-243.72) 960.2,-243.72 ; J2.3@955.36,-255.4 ccw(c943.68,-243.72) 960.2,-243.72 ; J2.3@955.36,-255.4 ccw(c943.68,-243.72) 960.2,-243.72 ; 960.2,-243.72 ccw(c976.72,-243.72) J2.3@965.04,-255.4 ; 960.2,-243.72 ccw(c976.72,-243.72) J2.3@965.04,-255.4 ; 960.2,-243.72 ccw(c976.72,-243.72) J2.3@965.04,-255.4 ; 960.2,-243.72 ccw(c976.72,-243.72) J2.3@965.04,-255.4 ; v1@993.64,613.64 cw(c978.27,598.27) 1000,598.27 ; v1@993.64,613.64 cw(c978.27,598.27) 1000,598.27 ; v1@993.64,613.64 cw(c978.27,598.27) 1000,598.27 ; v1@993.64,613.64 cw(c978.27,598.27) 1000,598.27 ; 1000,598.27 cw(c1021.73,598.27) v1@1006.36,613.64 ; 1000,598.27 cw(c1021.73,598.27) v1@1006.36,613.64 ; 1000,598.27 cw(c1021.73,598.27) v1@1006.36,613.64 ; 1000,598.27 cw(c1021.73,598.27) v1@1006.36,613.64
FLASH_WP: J2.5 U1.37 | length 1863.5
  Top Layer w6: v1(970,620) 970,660.74 U1.37@1105.63,796.37 ; v1@963.64,626.36 ccw(c948.27,641.73) 970,641.73 ; v1@963.64,626.36 ccw(c948.27,641.73) 970,641.73 ; v1@963.64,626.36 ccw(c948.27,641.73) 970,641.73 ; v1@963.64,626.36 ccw(c948.27,641.73) 970,641.73 ; 970,641.73 ccw(c991.73,641.73) v1@976.36,626.36 ; 970,641.73 ccw(c991.73,641.73) v1@976.36,626.36 ; 970,641.73 ccw(c991.73,641.73) v1@976.36,626.36 ; 970,641.73 ccw(c991.73,641.73) v1@976.36,626.36 ; 1068.56,759.29 cw(c1090.32,737.53) U1.37@1090.32,768.31 ; 1068.56,759.29 ccw(c1046.79,781.05) U1.37@1077.57,781.05 ; 1068.56,759.29 cw(c1090.32,737.53) U1.37@1090.32,768.31 ; 1068.56,759.29 ccw(c1046.79,781.05) U1.37@1077.57,781.05 ; 1068.56,759.29 cw(c1090.32,737.53) U1.37@1090.32,768.31 ; 1068.56,759.29 ccw(c1046.79,781.05) U1.37@1077.57,781.05 ; 1068.56,759.29 ccw(c1046.79,781.05) U1.37@1077.57,781.05 ; 1068.56,759.29 cw(c1090.32,737.53) U1.37@1090.32,768.31 ; 1078.8,769.54 cw(c1090.32,758.02) U1.37@1090.32,774.31 ; 1078.8,769.54 ccw(c1067.28,781.05) U1.37@1083.57,781.05 ; 1078.8,769.54 cw(c1090.32,758.02) U1.37@1090.32,774.31 ; 1078.8,769.54 ccw(c1067.28,781.05) U1.37@1083.57,781.05 ; 1078.8,769.54 cw(c1090.32,758.02) U1.37@1090.32,774.31 ; 1078.8,769.54 ccw(c1067.28,781.05) U1.37@1083.57,781.05 ; 1078.8,769.54 ccw(c1067.28,781.05) U1.37@1083.57,781.05 ; 1078.8,769.54 cw(c1090.32,758.02) U1.37@1090.32,774.31
  Bottom Layer w6: J2.5@928.7,-321.26 928.7,36.4 942,49.7 942,507.76 970,535.76 v1(970,620) ; J2.5@923.86,-255.4 ccw(c912.18,-243.72) 928.7,-243.72 ; J2.5@923.86,-255.4 ccw(c912.18,-243.72) 928.7,-243.72 ; J2.5@923.86,-255.4 ccw(c912.18,-243.72) 928.7,-243.72 ; J2.5@923.86,-255.4 ccw(c912.18,-243.72) 928.7,-243.72 ; 928.7,-243.72 ccw(c945.22,-243.72) J2.5@933.54,-255.4 ; 928.7,-243.72 ccw(c945.22,-243.72) J2.5@933.54,-255.4 ; 928.7,-243.72 ccw(c945.22,-243.72) J2.5@933.54,-255.4 ; 928.7,-243.72 ccw(c945.22,-243.72) J2.5@933.54,-255.4 ; v1@963.64,613.64 cw(c948.27,598.27) 970,598.27 ; v1@963.64,613.64 cw(c948.27,598.27) 970,598.27 ; v1@963.64,613.64 cw(c948.27,598.27) 970,598.27 ; v1@963.64,613.64 cw(c948.27,598.27) 970,598.27 ; 970,598.27 cw(c991.73,598.27) v1@976.36,613.64 ; 970,598.27 cw(c991.73,598.27) v1@976.36,613.64 ; 970,598.27 cw(c991.73,598.27) v1@976.36,613.64 ; 970,598.27 cw(c991.73,598.27) v1@976.36,613.64